# Altium PCB LM2587.PcbDoc
Units mm, origin at the board's own origin, x right, y up, seen from the top; angles counter-clockwise.
Board outline 46 x 33 mm, 2 copper layers (Top Layer, Bottom Layer), stack 1.581 mm thick; 11 components, 7 nets, 30 pads, 58 vias.
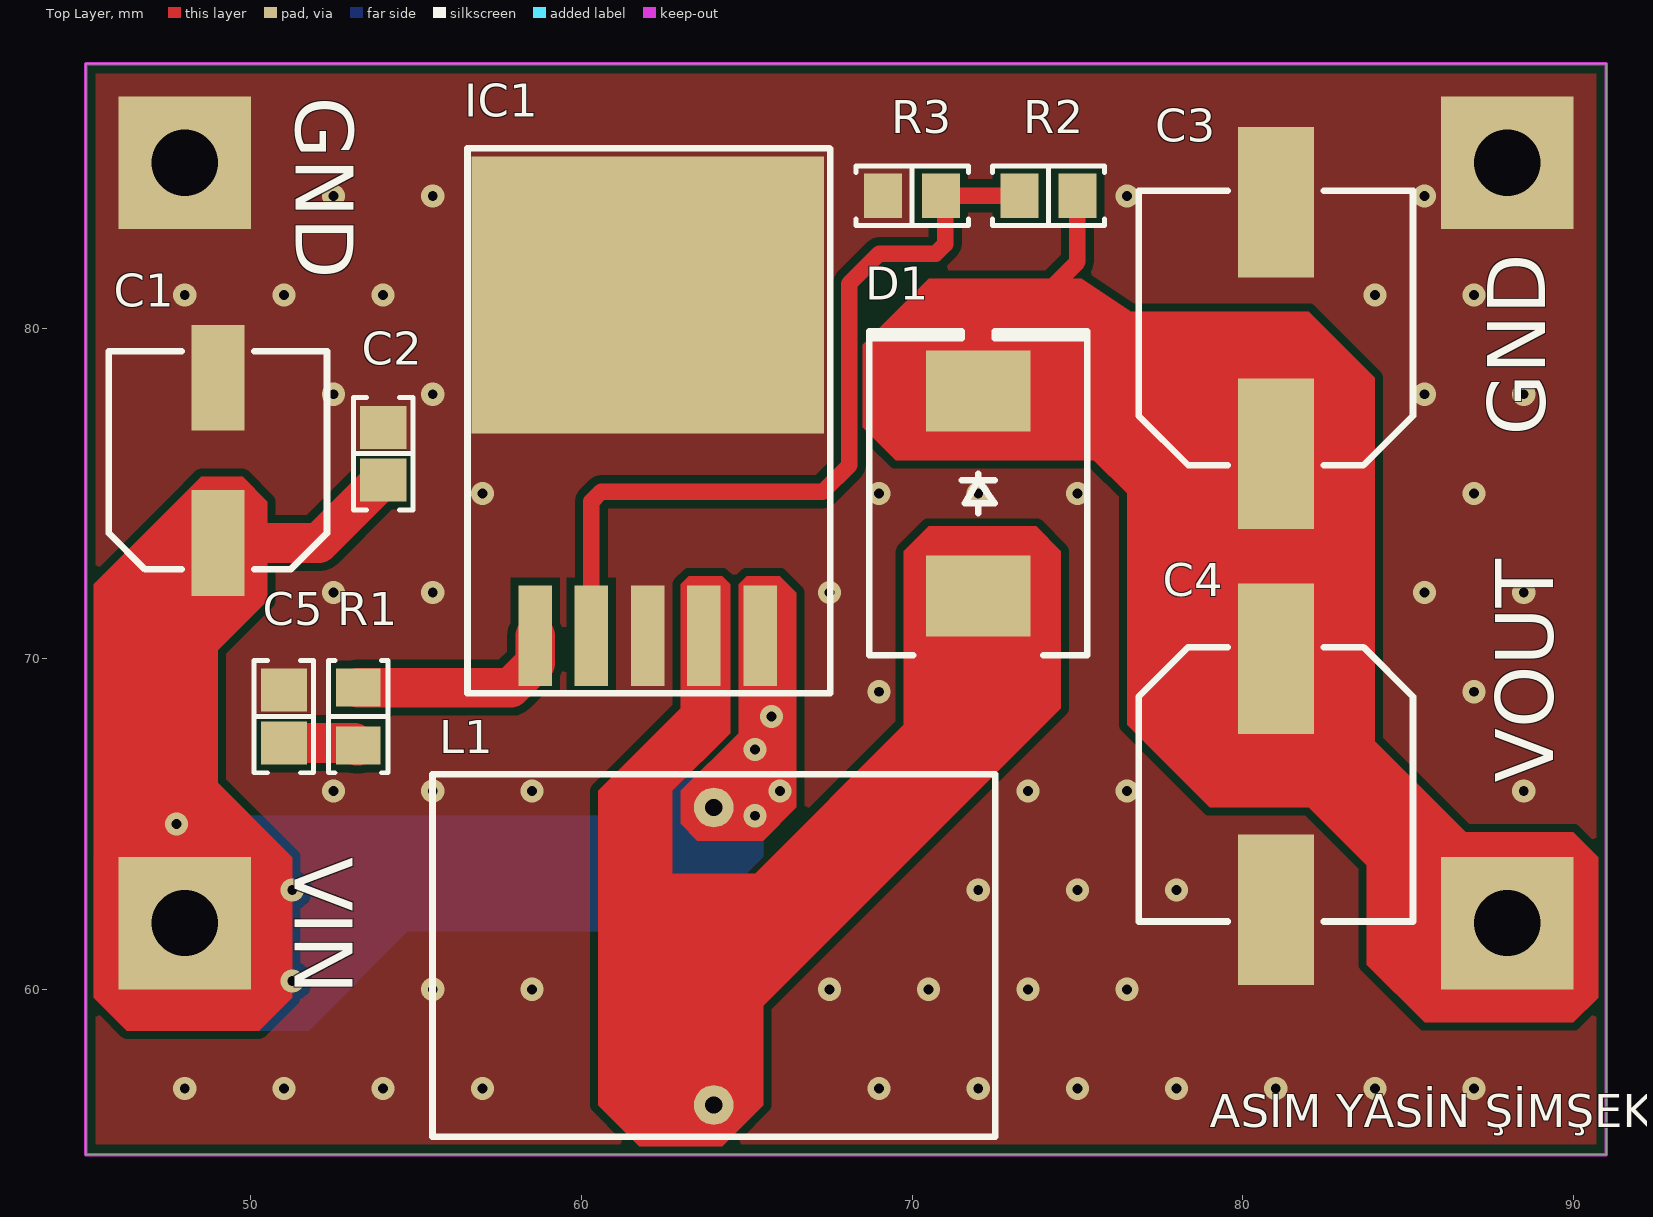
[diagram p0: Top Layer view]
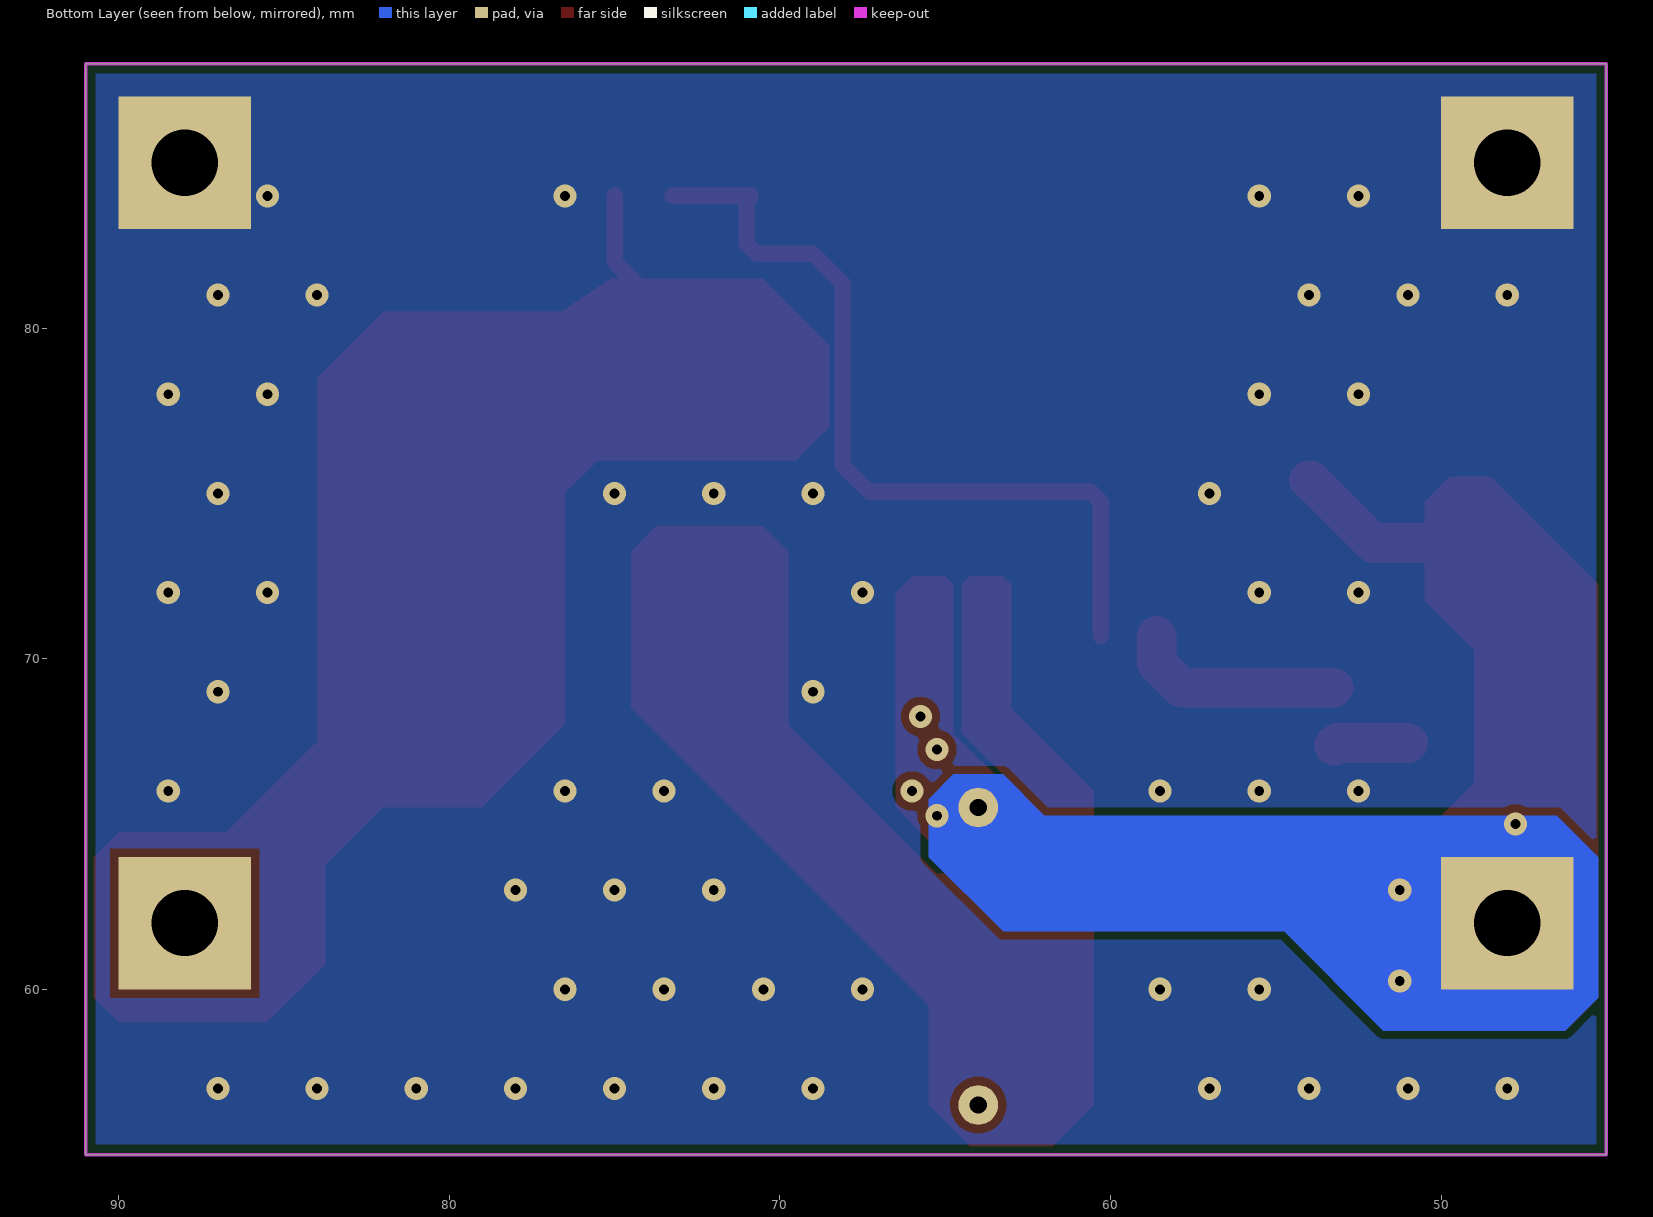
[diagram p1: Bottom Layer view, seen from below]
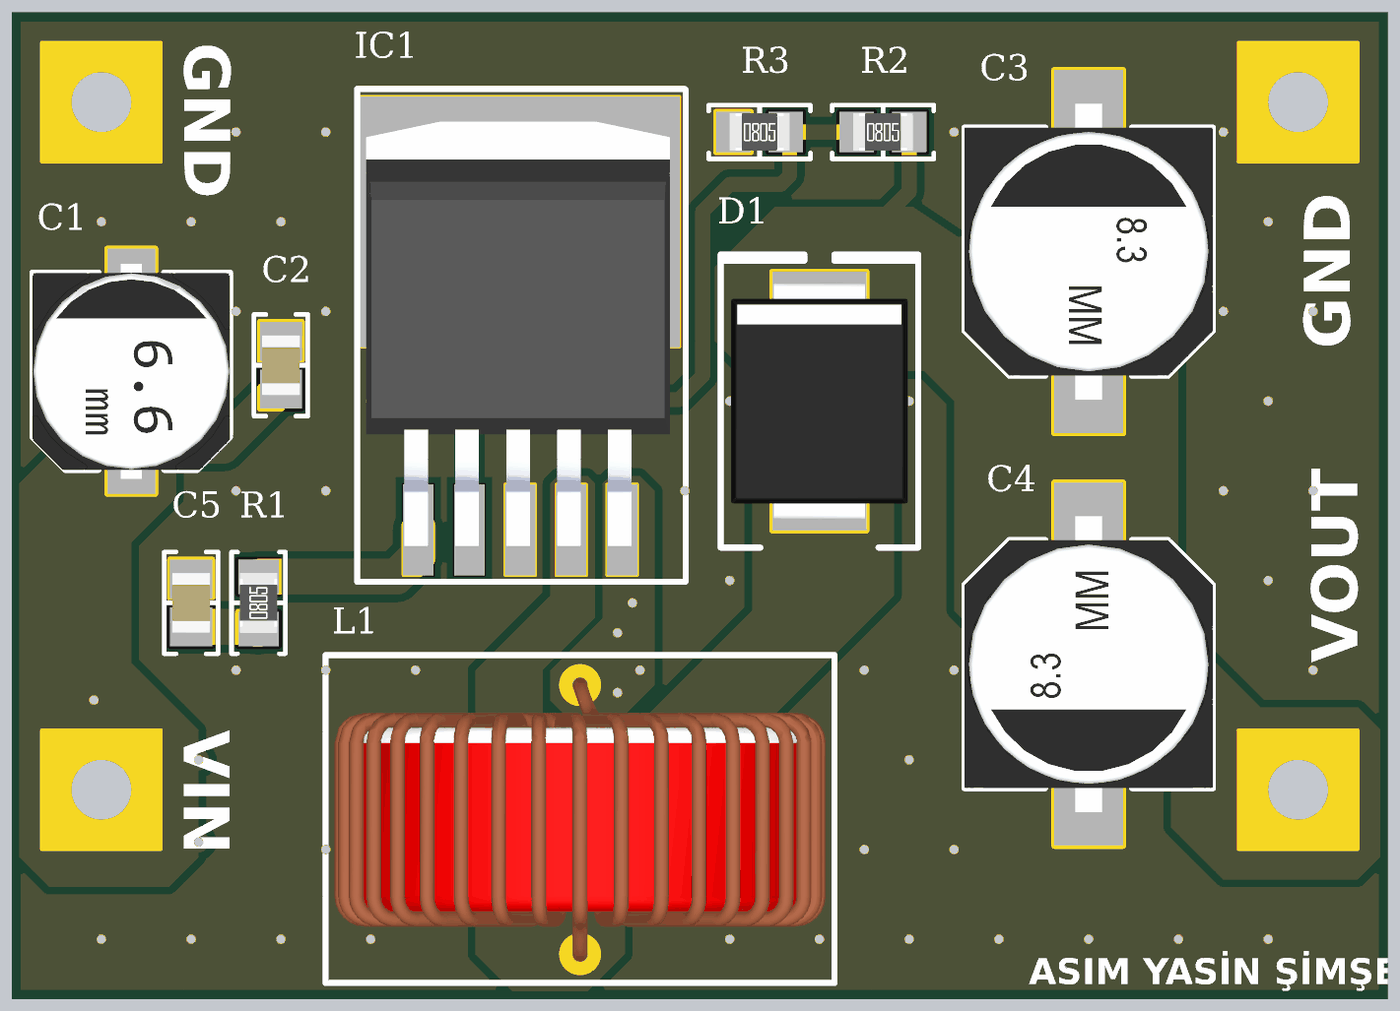
[diagram p2: 3D render of the assembled board from above, using the file's embedded part models]

## Layer stack, top to bottom
Top Solder: solder mask 0.0102, Solder Resist, Dk 3.5
Top Layer: signal copper 0.0356
Dielectric 1: dielectric 1.51, FR-4, Dk 4.8
Bottom Layer: signal copper 0.0356
Bottom Solder: solder mask 0.0102, Solder Resist, Dk 3.5

## Board outline
45,55 45,88 91,88 91,55

## Design rules (kind name [scope] priority, off if disabled: settings)
Clearance Clearance_1 [InPolygon] p1: gap=0.25 ignorepadtopadclearanceinfootprint=FALSE
Clearance [All] p2: gap=0.152 ignorepadtopadclearanceinfootprint=FALSE
PolygonConnect [All] p1: connectstyle=Direct reliefconductorwidth=0.254 reliefentries=4 polygonreliefangle="90 Angle" airgapwidth=0.254
RoutingVias [All] p1: holewidth=0.5 width=0.8 viastyle="Through Hole" minholewidth=0.3 minwidth=0.5 maxholewidth=1 maxwidth=2
SolderMaskExpansion [All] p1: expansion=0.102 istentingtop=FALSE
Width [All] p1: maxlimit=3 minlimit=0.152 preferedwidth=0.5
30 further rules are at their usual default settings.

## Classes and differential pairs
component class LM2587: C1 C2 C3 C4 C5 D1 IC1 R1 R2 R3

## Components (designator, comment, footprint, x,y, rotation, side; value= is the part's Value field where it differs from the comment)
C1 "56 µF" "CAP ALSMD 6.6MM H7.7MM" 49,76 r90 top
C2 "0.1µF" "CAP 0805_2012" 54,76.2 r270 top
C3 "100 µF" "CAP ALSMD 8.3MM H10.5MM" 81,80 r90 top
C4 "100 µF" "CAP ALSMD 8.3MM H10.5MM" 81,66.2 r270 top
C5 "0.68 µF" "CAP 0805_2012" 51,68.25 r270 top
D1 "SURS8360T3G" "DO214AB SMC" 72,75 r90 top
IC1 "LM2587" D2PAK 62,81 r270 top
L1 "100µH" 7447070 64,61 r0 top
R1 "3 kOhms" "RES 0805_2012" 53.25,68.25 r90 top
R2 "56 kOhms" "RES 0805_2012" 74.125,84 r0 top
R3 "2 kOhms" "RES 0805_2012" 70,84 r0 top

## Footprints (in the part's own frame and the unit in brackets; to place one, negate y for a bottom-side part, rotate by r counter-clockwise, add the part's x,y. Pads: shape width x height; smd on the part's side, far side on the other; paste and mask are expansions set on the pad)
7447070 [mm] "0.984\" Dia x 0.433\" W (25.00mm x 11.00mm)"
  round 1.2 hole 0.52: 1(0,4.5) 2(0,-4.5)
  silkscreen extent -8.51,-5.46 8.51,5.5, body extent -8.21,-4.75 8.21,4.75, height 16.41
"CAP 0805_2012" [mm] "Chip Capacitor, 2-Leads, Body 2.00x1.20mm, IPC Medium Density"
  rect 1.3x1.4 smd: 1(-0.8,0) 2(0.8,0)
  silkscreen extent -1.7,-0.9 1.7,0.9, body extent -1,-0.64 1,0.64, height 1.26
"CAP ALSMD 6.6MM H7.7MM" [mm] "Aluminum Electrolytic Capacitor, Body 6.60x6.60x7.70mm, IPC Low Density"
  rect 3.2x1.6 smd: 1(-2.5,0) 2(2.5,0)
  silkscreen extent -3.3,-3.3 3.3,3.3, body extent -3.6,-3.3 3.6,3.3, height 7.7
"CAP ALSMD 8.3MM H10.5MM" [mm] "Aluminum Electrolytic Capacitor, Body 8.30x8.30x10.50mm, IPC Low Density"
  rect 4.55x2.3 smd: 1(-3.8,0) 2(3.8,0)
  silkscreen extent -4.15,-4.15 4.15,4.15, body extent -4.95,-4.15 4.95,4.15, height 10.5
D2PAK [mm]
  rect 3.05x1.016 smd mask+0.05: 1(10.305,-3.404) 2(10.305,-1.702) 3(10.305,0) 4(10.305,1.702) 5(10.305,3.404)
  rect 8.38x10.66 smd mask+0.05: 3(0,0)
  silkscreen extent -4.45,-5.45 12.04,5.52, body extent -3.35,-5.15 10.85,5, height 4.57
"DO214AB SMC" [mm] "Molded Diode, 2-Leads, Body 6.85x5.90mm, IPC Medium Density"
  rect 2.45x3.15 smd: 1(-3.1,0) 2(3.1,0)
  silkscreen extent -4.9,-3.3 4.9,3.3, body extent -3.97,-2.95 3.97,2.95, height 2.6
"RES 0805_2012" [mm] "Chip Resistor, 2-Leads, Body 2.00x1.25mm, IPC Medium Density"
  rect 1.15x1.35 smd: 1(-0.875,0) 2(0.875,0)
  silkscreen extent -1.7,-0.9 1.7,0.9, body extent -1,-0.62 1,0.63, height 0.6

## Part data
C1: library part UWD1V560MCL1GS, "CAP ALUM 56UF 20% 35V SMD", Device Package="Radial, Can - SMD", Lifetime @ Temp.="2000 Hrs @ 105°C", manufacturer=Nichicon, Operating Temperature="-55°C ~ 105°C", Ripple Current @ High Frequency="280 mA @ 100 kHz", Ripple Current @ Low Frequency="140 mA @ 120 Hz", Supplier Part Number 1=493-9694-1-ND, Tolerance=±20%, Voltage - Rated="35 V", Applications="General Purpose", Capacitance="56 µF", componentlink1description=Datasheet, componentlink1url=http://nichicon-us.com/english/products/pdfs/e-uwd.pdf, componentlink2description="DigiKey Link", componentlink2url=https://www.digikey.com/en/products/detail/nichicon/UWD1V560MCL1GS/2550638, Height - Seated (Max)="0.303\" (7.70mm)", lastupdated="3.06.2024 20:16:18", Lifecycle Status=Active, Minimum Order=1, Mounting Type="Surface Mount", Package / Case="Radial, Can - SMD", packaging=TapeAndReel, Part Number=UWD1V560MCL1GS, Part Status=Active, partid=28126, Polarization=Polar, price=0.13, series=UWD, Size / Dimension="0.248\" Dia (6.30mm)", Supplier 1=DigiKey, Surface Mount Land Size="0.260\" L x 0.260\" W (6.60mm x 6.60mm)", Impedance="340 mOhms"
C2: library part MM055C104KCZ2A, "CAP CER 0.1UF 50V X7R 0805", Device Package="0805 (2012 Metric)", manufacturer="AVX Corporation", Operating Temperature="-55°C ~ 125°C", Supplier Part Number 1=478-10639-1-ND, Temperature Coefficient=X7R, Tolerance=±10%, Voltage - Rated=50V, Applications="Medical, Non-Critical", Capacitance=0.1µF, componentlink1description=Datasheet, componentlink1url=http://datasheets.avx.com/AVX-MM.pdf, componentlink2description="DigiKey Link", componentlink2url=http://digikey.com/product-detail/en/avx-corporation/MM055C104KCZ2A/478-10639-1-ND/7344900, lastupdated="2.09.2020 01:04:13", Lifecycle Status=Active, Minimum Order=1, Mounting Type="Surface Mount, MLCC", Package / Case="0805 (2012 Metric)", packaging=TapeAndReel, Part Number=MM055C104KCZ2A, Part Status=Active, partid=16381, price=0.45, series=MM, Size / Dimension="0.079\" L x 0.049\" W (2.01mm x 1.25mm)", Supplier 1=DigiKey, Thickness (Max)="0.029\" (0.74mm)"
C3 C4: library part EEE-FK1H101P, "CAP ALUM 100UF 20% 50V SMD", Device Package="Radial, Can - SMD", Lifetime @ Temp.="2000 Hrs @ 105°C", manufacturer="Panasonic Electronic Components", Operating Temperature="-55°C ~ 105°C", Ratings=AEC-Q200, Ripple Current @ High Frequency="350 mA @ 100 kHz", Ripple Current @ Low Frequency="262.5 mA @ 120 Hz", Supplier Part Number 1=PCE3809CT-ND, Tolerance=±20%, Voltage - Rated="50 V", Applications=Automotive, Capacitance="100 µF", componentlink2description="DigiKey Link", componentlink2url=https://www.digikey.com/en/products/detail/panasonic-electronic-components/EEE-FK1H101P/765978, Height - Seated (Max)="0.413\" (10.50mm)", lastupdated="3.06.2024 20:15:48", Lifecycle Status=Active, Minimum Order=1, Mounting Type="Surface Mount", Package / Case="Radial, Can - SMD", packaging=TapeAndReel, Part Number=EEE-FK1H101P, Part Status=Active, partid=7485, Polarization=Polar, price=0.22, series=FK, Size / Dimension="0.315\" Dia (8.00mm)", Supplier 1=DigiKey, Surface Mount Land Size="0.327\" L x 0.327\" W (8.30mm x 8.30mm)", Impedance="340 mOhms"
C5: library part C0805C684K5RACAUTO7210, "CAP CER 0.68UF 50V X7R 0805", Device Package="0805 (2012 Metric)", manufacturer=KEMET, Operating Temperature="-55°C ~ 125°C", Ratings=AEC-Q200, Supplier Part Number 1=399-C0805C684K5RACAUTO7210CT-ND, Temperature Coefficient=X7R, Tolerance=±10%, Voltage - Rated=50V, Applications="Automotive, Bypass, Decoupling", Capacitance="0.68 µF", componentlink1description=Datasheet, componentlink1url=https://api.kemet.com/component-edge/download/datasheet/C0805C684K5RACAUTO7210.pdf, componentlink2description="DigiKey Link", componentlink2url=https://www.digikey.com/en/products/detail/kemet/C0805C684K5RACAUTO7210/11676953, lastupdated="9.02.2024 20:15:07", Lifecycle Status=Active, Minimum Order=1, Mounting Type="Surface Mount, MLCC", Package / Case="0805 (2012 Metric)", packaging=TapeAndReel, Part Number=C0805C684K5RACAUTO7210, Part Status=Active, partid=32222, price=0.05, series="SMD Auto X7R", Size / Dimension="0.079\" L x 0.049\" W (2.00mm x 1.25mm)", Supplier 1=DigiKey, Thickness (Max)="0.057\" (1.45mm)"
D1: "DIODE GEN PURP 600V 3A SMC", Current - Average Rectified (Io)=3A, Current - Reverse Leakage @ Vr="10µA @ 600V", manufacturer="ON Semiconductor", Operating Temperature - Junction="-65°C ~ 175°C", Package / Case="DO-214AB, SMC", Supplier Device Package=SMC, Supplier Part Number 1=SURS8360T3GOSCT-ND, Voltage - DC Reverse (Vr) (Max)=600V, Voltage - Forward (Vf) (Max) @ If="1.25V @ 3A", componentlink1description=Datasheet, componentlink1url=http://www.onsemi.com/pub/Collateral/MURS320T3-D.PDF, componentlink2description="DigiKey Link", componentlink2url=http://digikey.com/product-detail/en/on-semiconductor/SURS8360T3G/SURS8360T3GOSCT-ND/9087771, Diode Type=Standard, lastupdated="3.06.2024 19:54:15", Lifecycle Status=Active, Minimum Order=1, Mounting Type="Surface Mount", packaging=TapeAndReel, Part Number=SURS8360T3G, Part Status=Active, partid=348, price=0.30, Reverse Recovery Time (trr)=75ns, series=-, Speed="Fast Recovery =< 500ns, > 200mA (Io)", Supplier 1=DigiKey
IC1: "Boost"
L1: library part SLF7032T-101MR45-2PF, "FIXED IND 100UH 450MA 540 MOHM", Current Rating (Amps)=450mA, DC Resistance (DCR)="540mOhm Max", Device Package=Nonstandard, manufacturer="TDK Corporation", Operating Temperature="-40°C ~ 105°C", Supplier Part Number 1=445-1999-1-ND, Tolerance=±20%, Inductance Frequency - Test=100kHz, componentlink1description=Datasheet, componentlink1url=//media.digikey.com/pdf/Data%20Sheets/TDK%20PDFs/SLF7032_Type.pdf, componentlink2description="DigiKey Link", componentlink2url=http://digikey.com/product-detail/en/tdk-corporation/SLF7032T-101MR45-2PF/445-1999-1-ND/755406, Height - Seated (Max)="0.134\" (3.40mm)", lastupdated="2.09.2020 01:30:23", Lifecycle Status=Active, Material - Core=Ferrite, Minimum Order=1, Mounting Type="Surface Mount", Package / Case=Nonstandard, packaging=TapeAndReel, Part Number=SLF7032T-101MR45-2PF, Part Status=Active, partid=3668, price=0.43, series=SLF, Shielding=Shielded, Size / Dimension="0.276\" L x 0.276\" W (7.00mm x 7.00mm)", Supplier 1=DigiKey, Type=Wirewound, Inductance=100µH
R1: library part TNPW08053K00BYEN, "RES 3K OHM 0.1% 1/8W 0805", Device Package="0805 (2012 Metric)", manufacturer="Vishay Dale", Operating Temperature="-55°C ~ 155°C", Power (Watts)="0.125W, 1/8W", Ratings=AEC-Q200, Supplier Device Package=0805, Supplier Part Number 1=541-TNPW08053K00BYENCT-ND, Temperature Coefficient=±10ppm/°C, Tolerance=±0.1%, componentlink1description=Datasheet, componentlink1url=https://www.vishay.com/docs/28758/tnpw_e3.pdf, componentlink2description="DigiKey Link", componentlink2url=https://www.digikey.com/en/products/detail/vishay-dale/TNPW08053K00BYEN/7658636, Composition="Thin Film", Features="Anti-Sulfur, Automotive AEC-Q200, Moisture Resistant", Height - Seated (Max)="0.022\" (0.55mm)", lastupdated="8.02.2024 20:59:56", Lifecycle Status=Active, Minimum Order=1, Number of Terminations=2, Package / Case="0805 (2012 Metric)", packaging=TapeAndReel, Part Number=TNPW08053K00BYEN, partid=80167, price=0.29, Resistance="3 kOhms", series="TNPW e3", Size / Dimension="0.079\" L x 0.049\" W (2.00mm x 1.25mm)", Supplier 1=DigiKey
R2: library part RMCF0805FT56K0, "RES 56K OHM 1% 1/8W 0805", Device Package="0805 (2012 Metric)", manufacturer="Stackpole Electronics Inc", Operating Temperature="-55°C ~ 155°C", Power (Watts)="0.125W, 1/8W", Ratings=AEC-Q200, Supplier Device Package=0805, Supplier Part Number 1=RMCF0805FT56K0CT-ND, Temperature Coefficient=±100ppm/°C, Tolerance=±1%, componentlink1description=Datasheet, componentlink1url=https://www.seielect.com/catalog/sei-packaging.pdf, componentlink2description="DigiKey Link", componentlink2url=https://www.digikey.com/en/products/detail/stackpole-electronics-inc/RMCF0805FT56K0/1760366, Composition="Thick Film", Features="Automotive AEC-Q200", Height - Seated (Max)="0.026\" (0.65mm)", lastupdated="8.02.2024 21:02:18", Lifecycle Status=Active, Minimum Order=1, Number of Terminations=2, Package / Case="0805 (2012 Metric)", packaging=CutTape, Part Number=RMCF0805FT56K0, Part Status=Active, partid=32591, price=0.01, Resistance="56 kOhms", series=RMCF, Size / Dimension="0.079\" L x 0.049\" W (2.00mm x 1.25mm)", Supplier 1=DigiKey
R3: library part TNPW08052K00FEEA, "RES 2K OHM 1% 1/8W 0805", Device Package="0805 (2012 Metric)", manufacturer="Vishay Dale", Operating Temperature="-55°C ~ 155°C", Power (Watts)="0.125W, 1/8W", Ratings=AEC-Q200, Supplier Device Package=0805, Supplier Part Number 1=541-3918-1-ND, Temperature Coefficient=±25ppm/°C, Tolerance=±1%, componentlink1description=Datasheet, componentlink1url=http://www.vishay.com/docs/28758/tnpw_e3.pdf, componentlink2description="DigiKey Link", componentlink2url=https://www.digikey.com/en/products/detail/vishay-dale/TNPW08052K00FEEA/7354893, Composition="Thin Film", Features="Anti-Sulfur, Automotive AEC-Q200, Moisture Resistant", Height - Seated (Max)="0.022\" (0.55mm)", lastupdated="8.02.2024 21:02:13", Lifecycle Status=Active, Minimum Order=1, Number of Terminations=2, Package / Case="0805 (2012 Metric)", packaging=TapeAndReel, Part Number=TNPW08052K00FEEA, Part Status=Active, partid=33621, price=0.05, Resistance="2 kOhms", series="TNPW e3", Size / Dimension="0.079\" L x 0.049\" W (2.00mm x 1.25mm)", Supplier 1=DigiKey

## Free pads (board coordinates)
  rect 4x4 hole 2 mask+0.05: GND(48,85) GND(88,85) VIN(48,62) VOUT(88,62)

## Via types
v1: diameter 0.7, hole 0.3, Top Layer to Bottom Layer, tented both sides, 58 vias

## Nets (pads, with @x,y where several pads share a name; then routed paths per layer and width w, separated by ;. In a path a pad name is that pad's centre, name@x,y a point inside that pad or via, vN(x,y) a via of type N, cw(c..) or ccw(c..) an arc to the next point about the centre after c; other vN are vias at no path point)
GND: C1.2 C2.1 C3.2 C4.2 C5.1 IC1.3 pad.GND R3.1
  other v1: 48,57 51,57 54,57 57,57 69,57 72,57 75,57 78,57 81,57 84,57 87,57 55.5,60 58.5,60 67.5,60 70.5,60 73.5,60 76.5,60 72,63 75,63 78,63 52.5,66 55.5,66 58.5,66 73.5,66 76.5,66 88.5,66 69,69 87,69 52.5,72 55.5,72 67.5,72 85.5,72 88.5,72 57,75 69,75 72,75 75,75 87,75 52.5,78 55.5,78 85.5,78 88.5,78 48,81 51,81 54,81 84,81 87,81 52.5,84 55.5,84 76.5,84 85.5,84
NetC5_2: C5.2 R1.1 | length 2.3
  Top Layer w1.2: C5.2 53.125,67.45 53.2,67.375 R1.1
NetD1_1: D1.1 IC1.4 L1.2
NetR1_2: IC1.1 R1.2 | length 6.5
  Top Layer w1.2: R1.2 57.859,69.125 58.596,69.862 IC1.1
NetR2_1: IC1.2 R2.1 R3.2 | length 25.1
  Top Layer w0.5: IC1.2 60.298,74.755 60.591,75.048 67.298,75.048 68.098,75.848 68.098,81.348 69,82.25 70.707,82.25 71,82.543 71,83.875 R3.2 R2.1
VIN: C1.1 C2.2 IC1.5 L1.1 pad.VIN | length 5.8
  Top Layer w1.2: C1.1 52.05,73.5 53.95,75.4 C2.2
  other v1: 51.25,60.25 51.25,63 47.75,65 65.25,65.25 66,66 65.25,67.25 65.75,68.25
VOUT: C3.1 C4.1 D1.2 pad.VOUT R2.2 | length 7.3
  Top Layer w0.5: D1.2 72.35,78.1 73.325,79.075 73.325,80.325 75,82 R2.2

## Polygon pours and split planes (outlines as drawn)
GND on Bottom Layer "GND_L02_P000" (solid, pour order 0): 45,88 91,88 91,55 45,55
GND on Top Layer "GND_L01_P002" (solid, pour order 2): 45,88 91,88 91,55 45,55

## Keep-outs
Keep-Out Layer:
  the board outline again, w0.1

## Other copper
Top Layer:
  region net VOUT: 84,67.5 86.75,64.75 90,64.75 90.75,64 90.75,59.75 90,59 85.5,59 83.75,60.75 83.75,63.75 82,65.5
  region net VIN: 48.5,75.5 49.75,75.5 50.5,74.75 50.5,71.75 49,70.25 49,66.25 51.25,64 51.25,59.75 50.25,58.75 46.25,58.75 45.25,59.75 45.25,72.25
  region net NetD1_1: 63,72.25 63.25,72.5 64.25,72.5 64.5,72.25 64.5,67.75 62.75,66 62.75,63.5 65.25,63.5 69.75,68 69.75,73.25 70.5,74 73.75,74 74.5,73.25 74.5,68.5 65.5,59.5 65.5,56.5 64.25,55.25 61.75,55.25 60.5,56.5 60.5,66 63,68.5
  region net VIN: 64.75,72.25 65,72.5 66,72.5 66.5,72 66.5,65.5 65.5,64.5 63.5,64.5 63,65 63,66 64.75,67.75
  region net VOUT: 70.5,81.5 75.125,81.5 76.625,80.5 82,80.5 84,78.5 84,67.5 82,65.5 79,65.5 76.5,68 76.5,75 75.5,76 69.5,76 68.5,77 68.5,79.5
Bottom Layer:
  region net VIN: 45.25,64 46.5,65.25 62,65.25 63.25,66.5 64.75,66.5 65.5,65.75 65.5,64 63.25,61.75 54.75,61.75 51.75,58.75 46.25,58.75 45.25,59.75

## Silkscreen, mask and mechanical layers (free items; w line width, h text height)
Top Overlay:
  text "GND" at 50.776,87 h3 r270
  text "GND" at 89.724,76.75 h3 r90
  text "VOUT" at 89.974,66.25 h3 r90
  text "VIN" at 50.756,64 h3 r270
  text "ASIM YASİN ŞİMŞEK" at 78.998,55.499 h1.7